# EAGLE board ai_gpiolabel_rpi_panel (EAGLE 7.1.0)

Size 86.62 x 56 mm. Coordinates in mm from the lower left corner, seen from the top.
Outline: 24.48,54.61 24.48,1.27 arc-90 23.21,0 7.97,0 arc-90 6.7,1.27 6.7,54.61 arc-90 7.97,55.88 23.21,55.88 arc-90 24.48,54.61
Outline: 0,0 6,0 6,56 0,56 0,0
Outline: 42.96,54.61 42.96,1.27 arc-90 41.69,0 26.45,0 arc-90 25.18,1.27 25.18,54.61 arc-90 26.45,55.88 41.69,55.88 arc-90 42.96,54.61
Outline: 61.44,54.61 61.44,1.27 arc-90 60.17,0 44.93,0 arc-90 43.66,1.27 43.66,54.61 arc-90 44.93,55.88 60.17,55.88 arc-90 61.44,54.61
Outline: 79.92,54.61 79.92,1.27 arc-90 78.65,0 63.41,0 arc-90 62.14,1.27 62.14,54.61 arc-90 63.41,55.88 78.65,55.88 arc-90 79.92,54.61
Outline: 80.62,0 86.62,0 86.62,56 80.62,56 80.62,0
Copper layers (1*16): Top 0.035mm / dielectric 1.5mm / Bottom 0.035mm
Design rules "ai_2layer": minimum track width 7mil, minimum drill 15mil, track to track 8mil, track to pad 8mil, pad to pad 8mil, via to via 8mil, smd to smd 8mil, copper to edge 8mil, drill to drill 8mil, minimum pad ring 12mil, minimum via ring 10mil, stop-mask expansion 4mil, vias tented up to drill 20mil, thermal gap 10mil

## Footprints (pad centres in the part's own frame; a part is rotated, then mirrored left to right if it is on the bottom)
2X20-RPI-NOFIRST = drill 1.016 pad 1.651: 1 -24.13,-1.27; 2 -24.13,1.27; 3 -21.59,-1.27; 4 -21.59,1.27; 5 -19.05,-1.27; 6 -19.05,1.27; 7 -16.51,-1.27; 8 -16.51,1.27; 9 -13.97,-1.27; 10 -13.97,1.27; 11 -11.43,-1.27; 12 -11.43,1.27; 13 -8.89,-1.27; 14 -8.89,1.27; 15 -6.35,-1.27; 16 -6.35,1.27; 17 -3.81,-1.27; 18 -3.81,1.27; 19 -1.27,-1.27; 20 -1.27,1.27; 21 1.27,-1.27; 22 1.27,1.27; 23 3.81,-1.27; 24 3.81,1.27; 25 6.35,-1.27; 26 6.35,1.27; 27 8.89,-1.27; 28 8.89,1.27; 29 11.43,-1.27; 30 11.43,1.27; 31 13.97,-1.27; 32 13.97,1.27; 33 16.51,-1.27; 34 16.51,1.27; 35 19.05,-1.27; 36 19.05,1.27; 37 21.59,-1.27; 38 21.59,1.27; 39 24.13,-1.27; 40 24.13,1.27

## Placement (x,y rotation side)
E$1  [CREATIVE-COMMONS]  43.18,-1.27 0 top
LABEL  2X20-RPI-NOFIRST  [2X20-RPI-NOFIRST]  15.59,27.94 270 top
LABEL1  2X20-RPI-NOFIRST  [2X20-RPI-NOFIRST]  34.07,27.94 270 top
LABEL2  2X20-RPI-NOFIRST  [2X20-RPI-NOFIRST]  52.55,27.94 270 top
LABEL3  2X20-RPI-NOFIRST  [2X20-RPI-NOFIRST]  71.03,27.94 270 top
U$1  AI-LOGOXS  [AI-LOGO-XS]  27.72,3.17 0 bottom
U$2  AI-LOGOXS  [AI-LOGO-XS]  9.24,3.17 0 bottom
U$3  AI-LOGOXS  [AI-LOGO-XS]  40.29,49.91 0 top
U$4  AI-LOGOXS  [AI-LOGO-XS]  21.81,49.91 0 top
U$5  AI-LOGOXS  [AI-LOGO-XS]  46.2,3.17 0 bottom
U$6  AI-LOGOXS  [AI-LOGO-XS]  58.77,49.91 0 top
U$7  AI-LOGOXS  [AI-LOGO-XS]  64.68,3.17 0 bottom
U$8  AI-LOGOXS  [AI-LOGO-XS]  77.25,49.91 0 top

## Library data of the parts
E$1 = Ai_Miscellany; REV: 1.0
LABEL LABEL1-LABEL3 = Ai_Connectors
U$1-U$8 = Ai_Miscellany

## Text on the board
tPlace: RASPERRY PI GPIO LABEL | RASPERRY PI GPIO LABEL | RASPERRY PI GPIO LABEL | RASPERRY PI GPIO LABEL | A+/B+/2 | A+/B+/2 | A+/B+/2 | A+/B+/2 | 3V3 | 3V3 | 3V3 | 3V3 | 5V | 5V | 5V | 5V | GP2 | GP2 | GP2 | GP2 | 5V | 5V | 5V | 5V | GP3 | GP3 | GP3 | GP3 | GND | GND | GND | GND | GP4 | GP4 | GP4 | GP4 | GP14 | GP14 | GP14 | GP14 | GND | GND | GND | GND | GP15 | GP15 | GP15 | GP15 | GP17 | GP17 | GP17 | GP17 | GP18 | GP18 | GP18 | GP18 | GP27 | GP27 | GP27 | GP27 | GND | GND | GND | GND | GP22 | GP22 | GP22 | GP22 | GP23 | GP23 | GP23 | GP23 | 3V3 | 3V3 | 3V3 | 3V3 | GP24 | GP24 | GP24 | GP24 | GP10 | GP10 | GP10 | GP10 | GND | GND | GND | GND | GP9 | GP9 | GP9 | GP9 | GP25 | GP25 | GP25 | GP25 | GP11 | GP11 | GP11 | GP11 | GP8 | GP8 | GP8 | GP8 | GND | GND | GND | GND | GP7 | GP7 | GP7 | GP7 | ID.SD | ID.SD | ID.SD | ID.SD | ID.SC | ID.SC | ID.SC | ID.SC | GP5 | GP5 | GP5 | GP5 | GND | GND | GND | GND | GP6 | GP6 | GP6 | GP6 | GP12 | GP12 | GP12 | GP12 | GP13 | GP13 | GP13 | GP13 | GND | GND | GND | GND | GP19 | GP19 | GP19 | GP19 | GP16 | GP16 | GP16 | GP16 | GP26 | GP26 | GP26 | GP26 | GP20 | GP20 | GP20 | GP20 | GND | GND | GND | GND | GP21 | GP21 | GP21 | GP21 | PI'S USB PORTS | PI'S USB PORTS | PI'S USB PORTS | PI'S USB PORTS
bPlace: RASPERRY PI GPIO LABEL | RASPERRY PI GPIO LABEL | RASPERRY PI GPIO LABEL | RASPERRY PI GPIO LABEL | A+/B+/2 | A+/B+/2 | A+/B+/2 | A+/B+/2 | 5V | 3V3 | 5V | 3V3 | 5V | 3V3 | 5V | 3V3 | 5V | 3 | 5V | 3 | 5V | 3 | 5V | 3 | https://acrobotic.com | GND | 5 | https://acrobotic.com | GND | 5 | https://acrobotic.com | GND | 5 | https://acrobotic.com | GND | 5 | 8 | 7 | 8 | 7 | 8 | 7 | 8 | 7 | 10 | GND | 10 | GND | 10 | GND | 10 | GND | 12 | 11 | 12 | 11 | 12 | 11 | 12 | 11 | GND | 13 | GND | 13 | GND | 13 | GND | 13 | 16 | 15 | 16 | 15 | 16 | 15 | 16 | 15 | 18 | 3V3 | 18 | 3V3 | 18 | 3V3 | 18 | 3V3 | GND | 19 | GND | 19 | GND | 19 | GND | 19 | 22 | 21 | 22 | 21 | 22 | 21 | 22 | 21 | 24 | 23 | 24 | 23 | 24 | 23 | 24 | 23 | 26 | GND | 26 | GND | 26 | GND | 26 | GND | ID.SC | ID.SD | ID.SC | ID.SD | ID.SC | ID.SD | ID.SC | ID.SD | GND | 29 | GND | 29 | GND | 29 | GND | 29 | 32 | 31 | 32 | 31 | 32 | 31 | 32 | 31 | GND | 33 | GND | 33 | GND | 33 | GND | 33 | 36 | 35 | 36 | 35 | 36 | 35 | 36 | 35 | v1.0 | 38 | 37 | v1.0 | 38 | 37 | v1.0 | 38 | 37 | v1.0 | 38 | 37 | 40 | GND | 40 | GND | 40 | GND | 40 | GND | PI'S USB PORTS | PI'S USB PORTS | PI'S USB PORTS | PI'S USB PORTS
tDocu: @MakerBro